# EAGLE board BR50_MKL_33840_Tender_Lichtplatine_V1 (EAGLE 5.10)
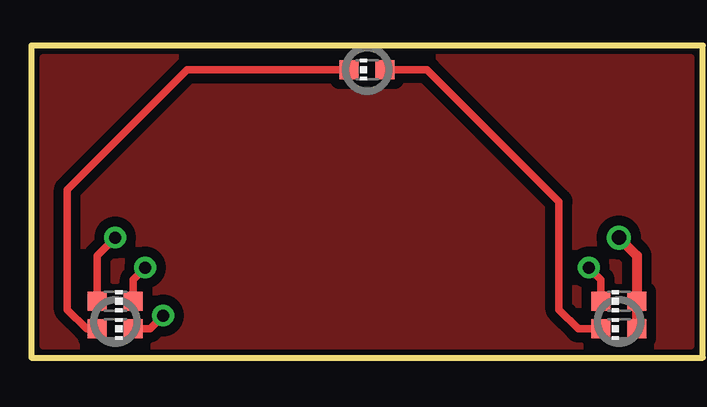
[diagram p0: board, top side]
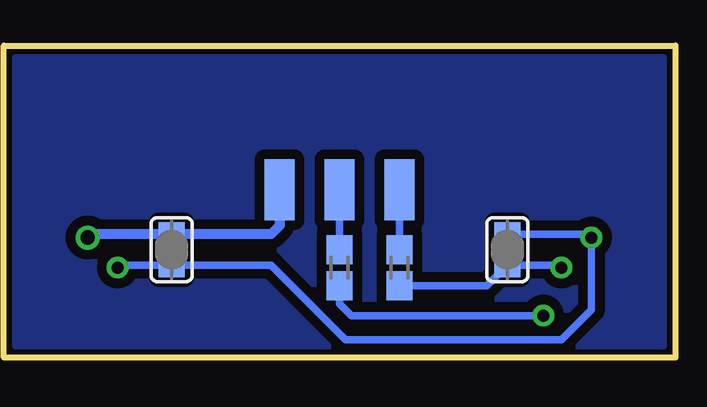
[diagram p1: board, bottom side, seen from below]

No outline drawn. Coordinates in mm, seen from the top.
Copper layers (1*16): Top 0.035mm / dielectric 1.5mm / Bottom 0.035mm
Design rules "default *": minimum track width 7mil, minimum drill 0.6mm, track to track 8mil, track to pad 8mil, pad to pad 8mil, via to via 8mil, smd to smd 8mil, copper to edge 40mil, drill to drill 8mil, minimum pad ring 10mil, minimum via ring 8mil, stop-mask expansion 4mil, vias tented up to drill 0mil, thermal gap 10mil
Milling: 4 lines

## Footprints (pad centres in the part's own frame; a part is rotated, then mirrored left to right if it is on the bottom)
CHIP-LED0603 = smd 0.8 x 0.8: A 0,-0.75; C 0,0.75
SMD1,27-2,54 = smd 1.27 x 2.54: 1 0,0
R0603S = smd 1.2 x 1.1: 1 -0.75,0; 2 0.75,0
SJS = smd 1 x 1.1: 1 -0.65,0; 2 0.65,0

## Placement (x,y rotation side)
AB1  [CHIP-LED0603]  3.5,1.2 270 top
AB2  [CHIP-LED0603]  24.5,1.2 90 top
AB3  [CHIP-LED0603]  14,12 90 top
HI  [SMD1,27-2,54]  11.5,7 180 bottom
PLUS  [SMD1,27-2,54]  16.5,7 180 bottom
R1  3k6  [R0603S]  14,3.75 90 bottom
R2  10k  [R0603S]  11.5,3.75 90 bottom
RUL  [CHIP-LED0603]  3.5,2.35 270 top
RUR  [CHIP-LED0603]  24.5,2.35 90 top
SJ1  [SJS]  21,4.5 270 bottom
SJ2  [SJS]  7,4.5 270 bottom
VO  [SMD1,27-2,54]  14,7 180 bottom

## Library data of the parts
AB1-AB3 RUL RUR = led
HI PLUS VO = wirepad
R1 R2 = rcl
SJ1 SJ2 = jumper

## Nets
N$1: AB2.C AB3.A
N$2: R1.2 VO.1
N$3: RUL.A RUR.C SJ1.2 SJ2.1
N$4: AB1.A AB3.C
N$5: AB1.C R1.1
N$6: HI.1 R2.2
N$10: AB2.A PLUS.1 RUR.A SJ1.1
N$13: R2.1 RUL.C SJ2.2

## Tracks (layer width: path | path; a pad name or v marks a point on that pad's centre or on a via)
N$1
  Top 0.305: AB2.C 22.8,1.2 22,2 22,6.5 16.5,12 AB3.A
N$2
  Bottom 0.305: R1.2 VO.1
N$3  (via drill 0.5)
  Top 0.305: RUL.A 2.75,4.25 v3.5,5 | RUR.C 23.75,3.25 v23.25,3.75
  Bottom 0.305: SJ2.1 3.65,5.15 v3.5,5 3.5,2 4.75,0.75 13.75,0.75 16.85,3.85 SJ1.2 23.15,3.85 v23.25,3.75
N$4
  Top 0.305: AB1.A 2.3,1.2 1.5,2 1.5,7 6.5,12 AB3.C
N$5  (via drill 0.5)
  Top 0.305: v5.5,1.75 4.95,1.2 AB1.C
  Bottom 0.305: R1.1 14,2.25 13.5,1.75 v5.5,1.75
N$6
  Bottom 0.305: R2.2 HI.1
N$7
  pour Bottom (isolate 0.406): 27.5,12.5 0.5,12.5 0.5,0.5 27.5,0.5
  pour Top (isolate 0.406): 27.5,12.5 0.5,12.5 0.5,0.5 27.5,0.5
N$10  (via drill 0.6)
  Top 0.406: AB2.A RUR.A 25.25,4.25 v24.5,5
  Bottom 0.406: v24.5,5 24.35,5.15 SJ1.1 16.85,5.15 16.5,5.5 PLUS.1
N$13  (via drill 0.5)
  Top 0.305: RUL.C 4.25,3.25 v4.75,3.75
  Bottom 0.305: v4.75,3.75 4.85,3.85 SJ2.2 7.85,3 R2.1

## Text on the board
tStop: BR50 LED | Für Märklin 33840 | design by Janik Merz
bStop: hi | vo | + | BR50 LED